# Altium PCB Buck.PcbDoc
Units mm, origin at the board's own origin, x right, y up, seen from the top; angles counter-clockwise.
Board outline 26.67 x 28.45 mm, 2 copper layers (Top Layer, Bottom Layer); 18 components, 8 nets, 40 pads, 10 vias.
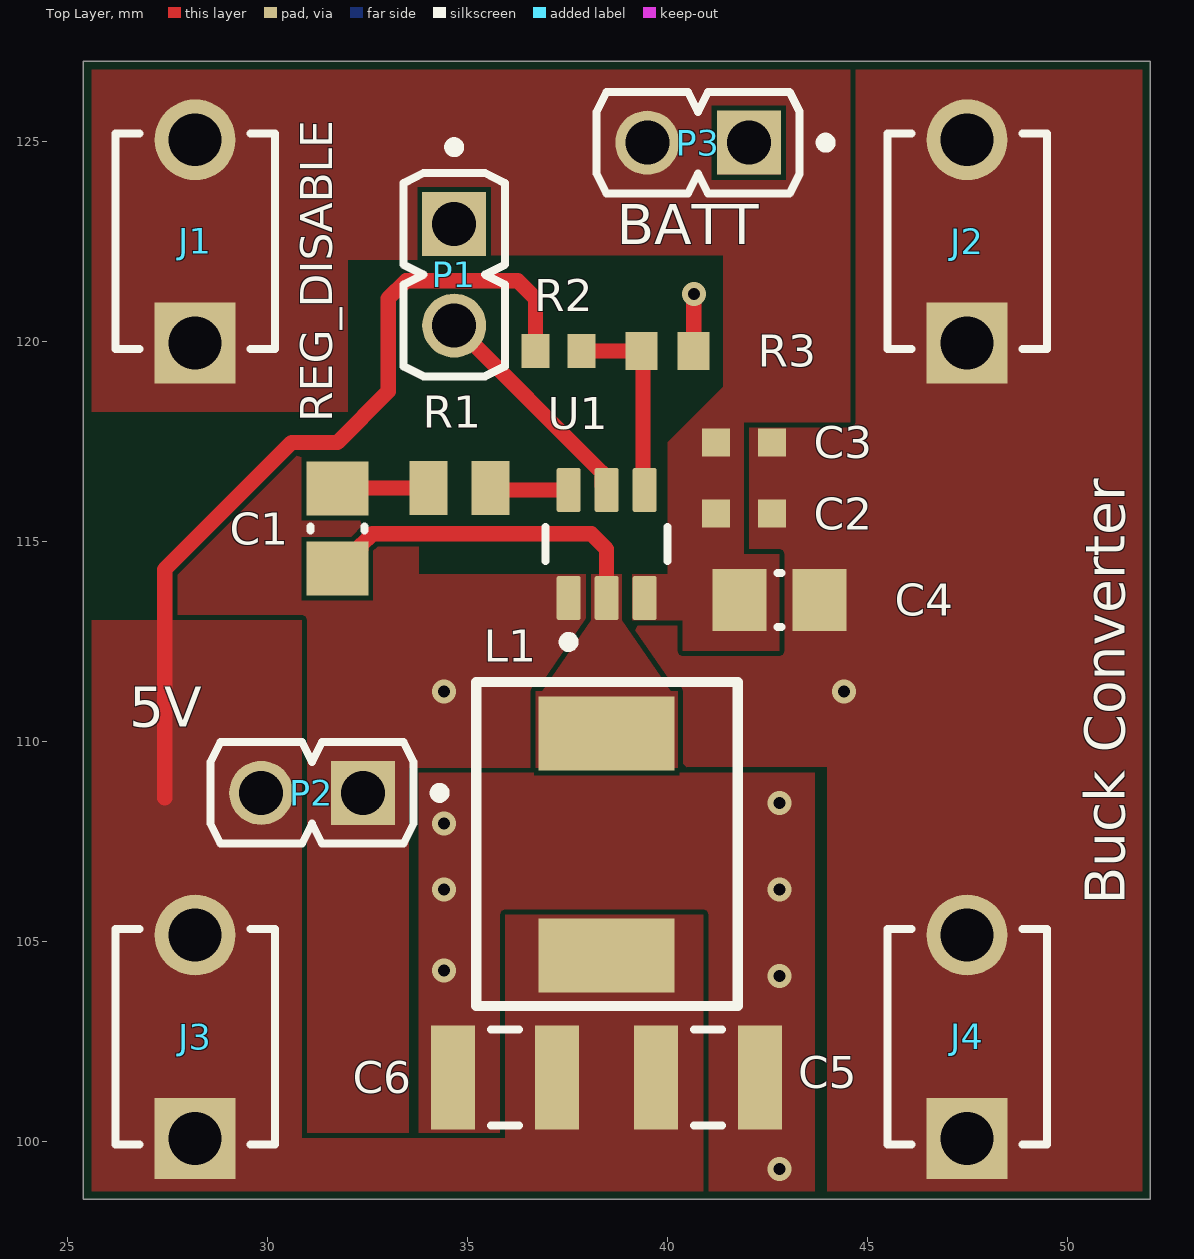
[diagram p0: Top Layer view]
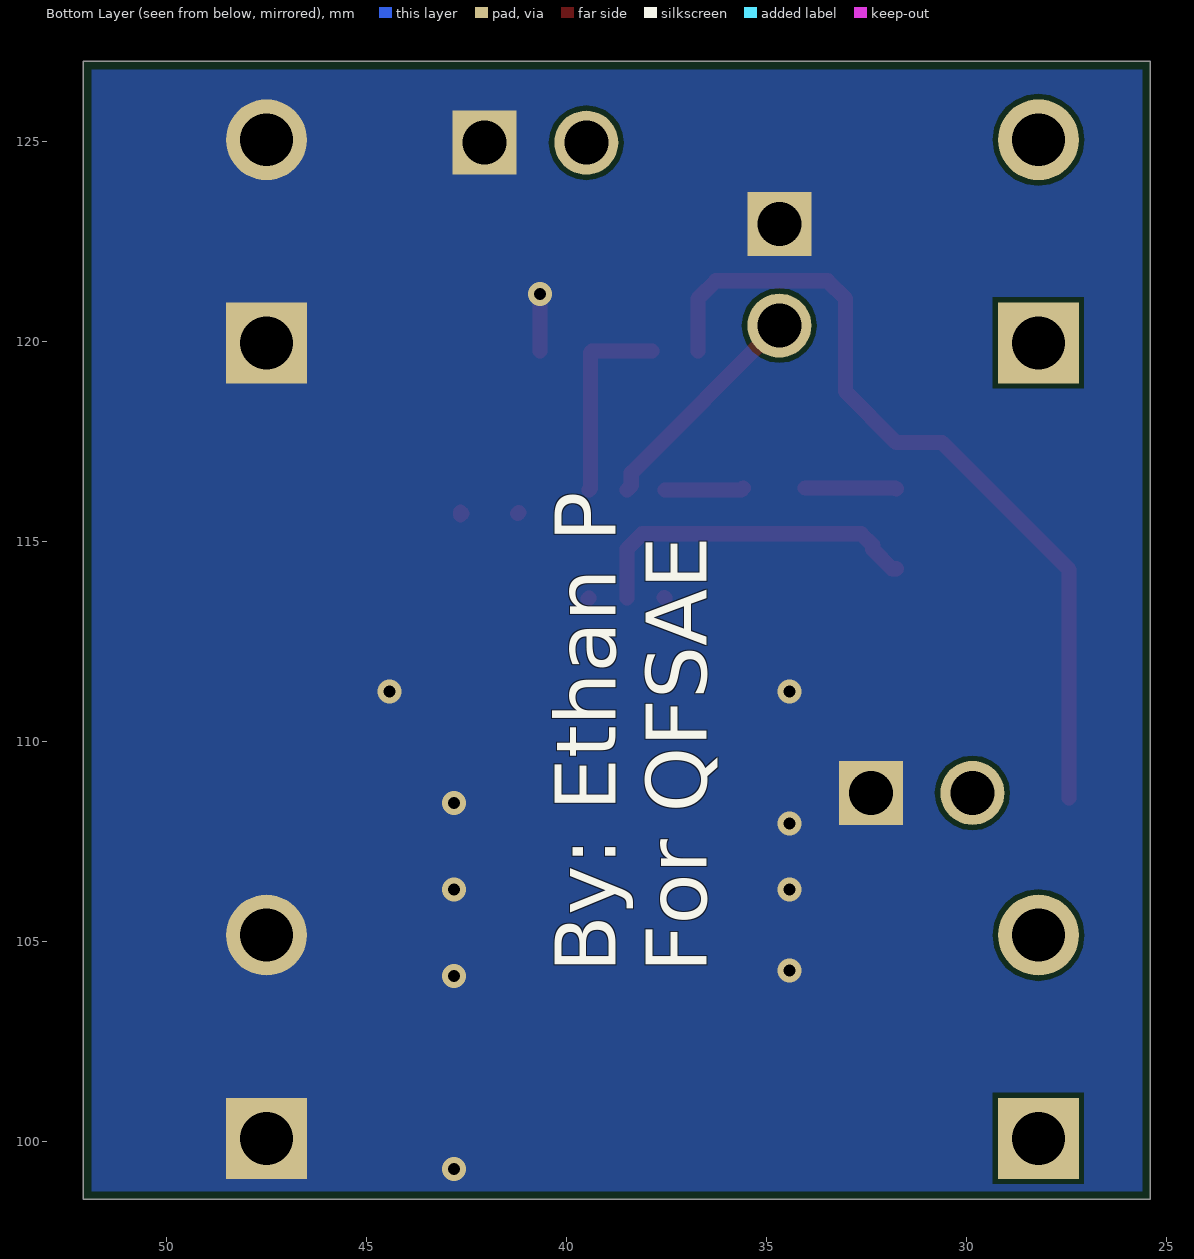
[diagram p1: Bottom Layer view, seen from below]
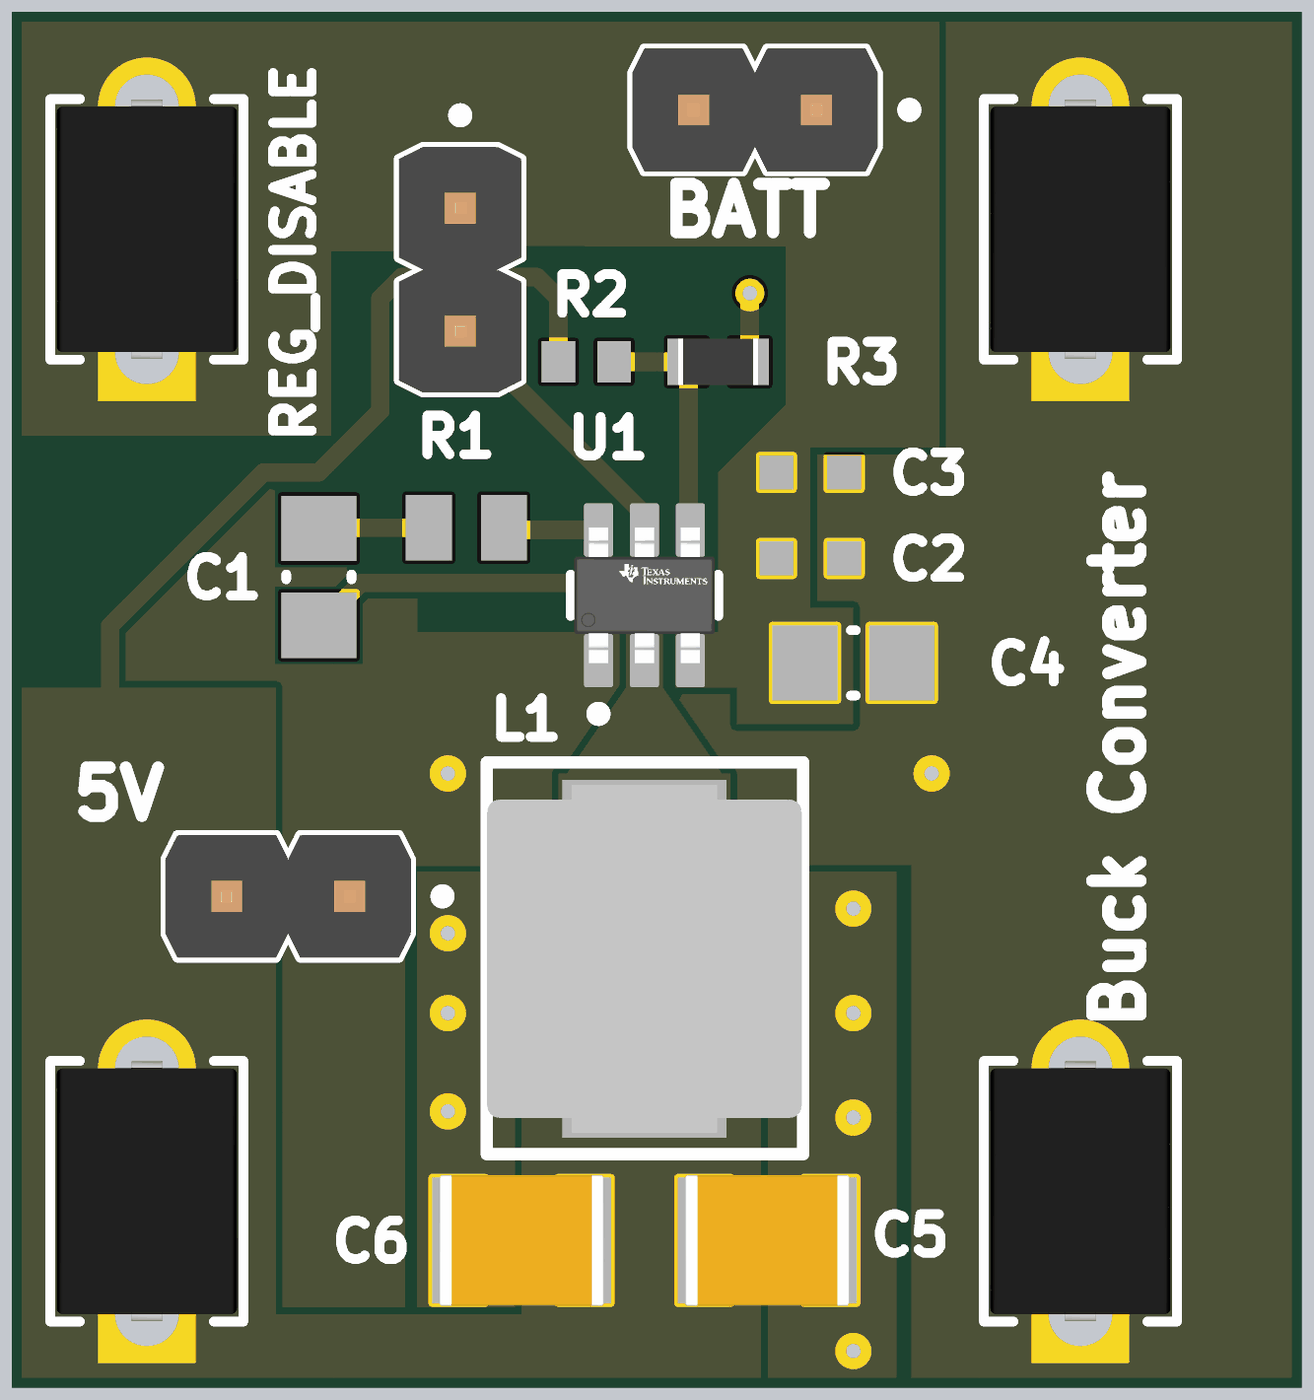
[diagram p2: 3D render of the assembled board from above, using the file's embedded part models]

## Layer stack, top to bottom
Top Solder: solder mask 0.0102, Solder Resist, Dk 3.5
Top Layer: signal copper 0.0356
Dielectric 1: dielectric 0.32, FR-4, Dk 4.8
Bottom Layer: signal copper 0.0356
Bottom Solder: solder mask 0.0102, Solder Resist, Dk 3.5

## Board outline
25.4,98.552 25.4,127 52.07,127 52.07,98.552

## Design rules (kind name [scope] priority, off if disabled: settings)
BoardOutlineClearance [All] p1: gap=0.2 ignorepadtopadclearanceinfootprint=FALSE
Clearance [All] p1: gap=0.127 ignorepadtopadclearanceinfootprint=FALSE except(0.25: Arc-Hole Track-Hole SMDPad-Hole THPad-Hole Via-Hole Fill-Hole Poly-Hole Region-Hole Text-Hole)
ComponentClearance [All] p1: gap=0.127 collisioncheckmode=3 verticalgap=0.127 showdistances=TRUE
DiffPairsRouting [All] p1: maxlimit=0.254 minlimit=0.127 mostfreqgap=0.127 toplayer_minwidth=0.127 toplayer_maxwidth=25.4 toplayer_prefwidth=0.127 bottomlayer_minwidth=0.127 bottomlayer_maxwidth=25.4 bottomlayer_prefwidth=0.127 maxuncoupledlength=12.7
Height [All] p1: minheight=0 maxheight=1816.048 prefheight=12.7
HoleSize [All] p1: absolutevalues=TRUE maxlimit=6.3 minlimit=0.3 maxpercent=80.000 minpercent=20.000
HoleToHoleClearance [All] p1: gap=0.25 allowstackedmicrovias=FALSE
MinimumAnnularRing [All] p1: minimumring=0.076
MinimumSolderMaskSliver [All] p1: minsoldermaskwidth=0
PlaneClearance [All] p1: clearance=0.127
PlaneConnect PlaneConnectPowerPads [InPadClass('PowerPads')] p1: planeconnectstyle=Direct reliefexpansion=0.508 reliefentries=4 reliefconductorwidth=0.254 reliefairgap=0.254
PlaneConnect [All] p2: pad.planeconnectstyle=Relief pad.reliefexpansion=0.3 pad.reliefentries=4 pad.reliefconductorwidth=0.127 pad.reliefairgap=0.127 via.planeconnectstyle=Direct via.reliefexpansion=0.3 via.reliefentries=4 via.reliefconductorwidth=0.127 via.reliefairgap=0.127
PolygonConnect PolygonConnectPowerPads [All vs InNet('GND') or InNet('SW') or InNet('VCC5V') or InNet('VCC_BATT')] p1: connectstyle=Direct reliefconductorwidth=0.254 reliefentries=4 polygonreliefangle="90 Angle" airgapwidth=0.254
PolygonConnect [All] p2: thpad.connectstyle=Relief thpad.reliefconductorwidth=0.127 thpad.reliefentries=4 thpad.polygonreliefangle="90 Angle" thpad.airgapwidth=0.127 smdpad.connectstyle=Relief smdpad.reliefconductorwidth=0.127 smdpad.reliefentries=4 smdpad.polygonreliefangle="90 Angle" smdpad.airgapwidth=0.127 via.connectstyle=Direct via.reliefconductorwidth=0.127 via.reliefentries=4 via.polygonreliefangle="90 Angle" via.airgapwidth=0.127
RoutingVias [All] p1: holewidth=0.3 width=0.6 viastyle="Through Hole" minholewidth=0.3 minwidth=0.6 maxholewidth=0.6 maxwidth=6.6
SilkToSilkClearance [All] p1: silktosilkclearance=0
SilkToSolderMaskClearance [IsPad] p1: minsilkscreentomaskgap=0.127 clearancetoexposedcopper=TRUE
SolderMaskExpansion [All] p1: expansion=0.075 istentingtop=FALSE
Width [All] p1: maxlimit=25.4 minlimit=0.127 preferedwidth=0.127 minimp=50.000000 maximp=50.000000 favimp=50.000000
20 further rules are at their usual default settings.

## Components (designator, comment, footprint, x,y, rotation, side; value= is the part's Value field where it differs from the comment)
C1 "CAP 100nF 50V 0805(2012)" CAPC0805(2012)100_M 31.75,115.316 r90 top value=100nF
C2 "10 uF" CAPC1608X100X20VL10T10 41.91,115.697 r180 top
C3 "10 uF" CAPC1608X100X20VL10T10 41.91,117.475 r180 top
C4 "CAP 100nF 50V" CAPC0805(2012)100_M 42.799,113.538 r180 top value=100nF
C5 "22 uF" CAPC3225X279X50LL20T25 41.021,101.6 r180 top
C6 "22 uF" CAPC3225X279X50LL20T25 35.941,101.6 r0 top
J1 "105-1103-001" FP-105-1103-001-MFG 28.194,122.5 r90 top
J2 "105-1103-001" FP-105-1103-001-MFG 47.494,122.5 r90 top
J3 "105-1103-001" FP-105-1103-001-MFG 28.194,102.616 r90 top
J4 "105-1103-001" FP-105-1103-001-MFG 47.494,102.616 r90 top
L1 "5.6 uH" 470 38.481,107.423 r270 top
P1 "613 002 111 21" WE-61300211121_V 34.671,121.666 r270 top
P2 "613 002 111 21" WE-61300211121_V 31.115,108.712 r180 top
P3 "613 002 111 21" WE-61300211121_V 40.767,124.968 r180 top
R1 "30 RR1220Q-300-D" RESC2013X50X40LL20T20 34.798,116.332 r180 top
R2 "52.3k" RESC1609X50X30LL10T20 37.278,119.761 r180 top
R3 "10k" RESC1609X50X30NL8T20 40.005,119.761 r180 top
U1 "TPS56339DDCR" FP-DDC0006A-MFG 38.481,114.935 r90 top

## Footprints (in the part's own frame and the unit in brackets; to place one, negate y for a bottom-side part, rotate by r counter-clockwise, add the part's x,y. Pads: shape width x height; smd on the part's side, far side on the other; paste and mask are expansions set on the pad)
470 [mm]
  rect 1.85x3.4 smd mask+0: 1(-2.775,0) 2(2.775,0)
  silkscreen extent -4.06,-3.26 4.04,3.28, body extent -3.59,-3.25 3.59,3.25, height 3.97
CAPC0805(2012)100_M [mm] "Chip Capacitor, Body 2.0x1.2mm, Height 1.0mm, IPC Low Density"
  rect 1.35x1.55 smd: 1(-1,0) 2(1,0)
  silkscreen extent -0.05,-0.67 0.05,0.67, body extent -1.1,-0.72 1.1,0.72, height 1
CAPC1608X100X20VL10T10 [mm] "Chip CAP, 2-Leads, Body 1.6x0.8mm"
  rect 0.7x0.7 smd: 1(-0.7,0) 2(0.7,0)
  body extent -0.8,-0.4 0.8,0.4, height 1
CAPC3225X279X50LL20T25 [mm] "Chip Capacitor, 2-Leads, Body 3.40x2.70mm, IPC High Density"
  rect 1.1x2.6 smd: 1(-1.3,0) 2(1.3,0)
  silkscreen extent -0.35,-1.2 0.35,1.2, body extent -1.7,-1.35 1.7,1.35, height 2.79
FP-105-1103-001-MFG [mil]
  rect 79.56x79.56 hole 52 paste-39370.1 mask+0: 1(-100,0)
  round 79.56 hole 52 paste-39370.1 mask+0: 1(100,0)
  silkscreen extent -106,-79 106,79, body extent -144,-82 144,82, height 10
FP-DDC0006A-MFG [mm]
  rrect17% 1.1x0.6 smd paste+0 mask+0: 1(-1.35,0.95) 2(-1.35,0) 3(-1.35,-0.95) 4(1.35,-0.95) 5(1.35,0) 6(1.35,0.95)
  silkscreen extent -2.57,-1.53 0.42,1.53, body extent -2,-1.63 2,1.63, height 0.25
RESC1609X50X30LL10T20 [mm] "Chip Resistor, 2-Leads, Body 1.55x0.85mm, IPC High Density"
  rect 0.7x0.85 smd: 1(-0.575,0) 2(0.575,0)
  body extent -0.82,-0.48 0.82,0.48, height 0.5
RESC1609X50X30NL8T20 [mm] "Chip Resistor, 2-Leads, Body 1.65x0.95mm, IPC Medium Density"
  rect 0.8x0.95 smd: 1(-0.65,0) 2(0.65,0)
  body extent -0.82,-0.48 0.82,0.48, height 0.5
RESC2013X50X40LL20T20 [mm] "Chip Resistor, 2-Leads, Body 2.00x1.25mm, IPC High Density"
  rect 0.95x1.35 smd: 1(-0.775,0) 2(0.775,0)
  body extent -1.1,-0.72 1.1,0.72, height 0.5
WE-61300211121_V [mm] "Header, 2-Leads, Body 5.08x2.54mm, Pitch 2.54mm"
  rect 1.6x1.6 hole 1.1: 1(-1.27,0)
  round 1.6 hole 1.1: 2(1.27,0)
  silkscreen extent -3.31,-1.27 2.54,1.27, body extent -2.54,-1.27 2.54,1.27, height 8.54

## Part data
C1 C4: library part CMP-1036-04423-1, "CAP 100nF 50V ±20% 0805 (2012 Metric) Thickness 1mm SMD", Case-EIA=0805, Case-Metric=2012, Rated Voltage="50 V", Tolerance=Â±20%, Max Thickness="1 mm", Technology=SMT
C2 C3: library part CMP-2000-05442-1, "Chip Capacitor, 10 uF, +/- 20%, 25 V, -55 to 85 degC, 0603 (1608 Metric), RoHS, Tape and Reel", Capacitance=10µF, Manufacturer=TDK, Operating Temperature=-55degC~85degC, Package / Case=0603(1608Metric), Package Description="2-Pin Surface Mount Device, Body 1.6 x 0.8 mm", Package Reference=1608, PCN Part Number=MLCCPartNumberChange30/Nov/2012, Ratings=-, Standard Package=1, Temperature Coefficient=X5R, Tolerance=±20%, Voltage - Rated=25V, Applications=GeneralPurpose, Category=Capacitors, Datasheet URL=http://download.siliconexpert.com/pdfs/2016/2/22/9/40/35/949/tdk_/manual/8010476609961980104703407078c1608x5r1e106m080ac.pdf.pdf, Datasheet Version=Feb-16, Design Resources=20WNon-IsolatedBuckLEDDriverUsingPLLNK460KG, Family=CeramicCapacitors, Features=-, Height - Seated (Max)=-, Kits=445-9014-KIT-ND-KITMLCC100PF-22UF060310-50V, Lead Spacing=-, Lead Style=-, Manufacturer URL=http://www.tdk.com/, Mounting Type=SurfaceMount,MLCC, Online Catalog=CSeries,GeneralPurpose, Other Names=445-9015-1, Packaging=CutTape(CT), Product Training Modules=SEAT,CCV,andTVCLDesignToolsGuidetoReplacinganElectrolyticCapacitorwithanMLCC, RoHS Information=RoHSCertificate-MLCC, Series=C, Size / Dimension="0.063\"Lx0.031\"W(1.60mmx0.80mm)", Thickness (Max)="0.039\"(1.00mm)"
C5 C6: library part CMP-2000-05479-1, "Chip Capacitor, 22 uF, +/- 20%, 25 V, -55 to 85 degC, 1210 (3225 Metric), RoHS, Tape and Reel", Capacitance=22µF, Case Size/Dimension=1206, Dielectric=X5R, Manufacturer=AVX, Package Description="2-Pin Surface Mount Device, Body 3.2 x 2.5 mm", Package Reference=1210, Rated Voltage=25V, Tolerance (%)=±20%, Datasheet URL=http://datasheets.avx.com/cx5r.pdf, Datasheet Version=05/2016, Manufacturer URL=http://www.avx.com/, Mounting Technology=SurfaceMount
J1 J2 J3 J4: library part CMP-16032-000001-1, "CONN TIP JACK SOLDER BLACK", Current Rating=5A, Manufacturer="Bel Fuse", Temperature="-55°C to +75°C", Temperature Range High=+75°C, Temperature Range Low=-55°C, Voltage Rating=1500V, Automotive=No, Category=Conn, ComponentLink2Description=Datasheet, ComponentLink2URL=https://www.belfuse.com/resources/drawings/cinchconnectivitysolutions/johnson/dr-ccs-john-105-1103-001.pdf, Conn Gender=Female, Conn Orientation="Right Angle", Contact Material=Silver, Device Class L1=Connectors, Device Class L2="Headers and Wire Housings", Device Class L3=unset, Digikey Description="CONN TIP JACK SOLDER BLACK", Height=0.213inch, Is Female=yes, Lead Free=Yes, Manufacturer Part Number=105-1103-001, Number Of Contacts=1, Number Of Rows=1, Octopart=https://octopart.com/105-1103-001-bel+fuse-73381038, Package=105-1103-001, RoHS=TRUE
L1: library part SRP6540-5R6M
P1 P2 P3: library part CMP-1712-00002-3, "Male Header, Pitch 2.54 mm, 1 x 2 Position, Height 8.54 mm, Tail Length 3 mm, -40 to 105 degC, RoHS, Bulk", Max Operating Temperature="125 degC", Min Operating Temperature="-40 degC", ComponentLink1Description="Manufacturer URL", ComponentLink1URL=https://www.we-online.com/, ComponentLink2Description=Datasheet, ComponentLink2URL=http://katalog.we-online.de/em/datasheet/6130xx11121.pdf, DatasheetVersion="Rev. J", Mount="Through Hole", Mounting Technology="Through Hole", PackageDescription="Male Header, Pitch 2.54 mm, 1 x 2 Position, Height 8.54 mm, Tail Length 3 mm", Packaging=Bulk, PartNumber="613 002 111 21", Pins=2, REACH SVHC="No SVHC", RoHSCompliant=True
R1: library part CMP-2001-03553-1, Manufacturer=Susumu, Part Number=RR1220Q-300-D
R2: library part CMP-2000-03451-1, Manufacturer="Vishay Dale", Part Number=CRCW060352K3FKEA
R3: library part CMP-1666-00005-4, "Chip Resistor, 10 KOhm, +/- 1%, 100 mW, -55 to 155 degC, 0603 (1608 Metric), RoHS, Tape and Reel", Manufacturer="Vishay Semiconductor", Max Operating Temperature="155 degC", Min Operating Temperature="-55 degC", Package Quantity=5000, Voltage Rating="75 V", ComponentLink1Description="Manufacturer URL", ComponentLink1URL=http://www.vishay.com/, ComponentLink2Description=Datasheet, ComponentLink2URL=https://datasheet.ciiva.com/11809/0900766b80d98afc-11809037.pdf, DatasheetVersion=06/2012, Height="0.45 mm", Length="1.55 mm", Mounting Technology="Surface Mount", PackageDescription="2-Pin Surface Mount Device, Body 1.575 x 0.85 mm", PackageReference=0603, Packaging="Tape and Reel", REACH SVHC=Unknown, RoHSCompliant=true
U1: library part CMP-04918-000012-1, "PWR MGMT SPECIALIZED REGULATOR", Manufacturer="Texas Instruments", Max Junction Temp=+125°C, Max Supply Voltage=24V, Min Supply Voltage=4.5V, Nominal Supply Current=98uA, Output Current=3A, Output Voltage=0.8-16V, Package=DDC0006A, Switching Frequency=500kHz, Temperature="-40°C to +125°C", Temperature Range Low=-40°C, Automotive=No, Category=IC, ComponentLink2Description=Datasheet, ComponentLink2URL=http://www.ti.com/lit/ds/symlink/tps56339.pdf, Device Class L1="Integrated Circuits (ICs)", Device Class L2="Power Management ICs", Device Class L3="Voltage Regulators - Switching", Digikey Description="PWR MGMT SPECIALIZED REGULATOR", Height=1.1mm, Lead Free=Yes, Manufacturer Part Number=TPS56339DDCR, Max Duty Cycle=97%, Mouser Description="4.5-V to 24-V input, 3-A output synchronous buck converter 6-SOT-23-THIN -40 to 125", Number Of Outputs=1, Octopart=https://octopart.com/tps56339ddcr-texas+instruments-101466410, Output Type=AdjustableProgrammable, RoHS=TRUE, Standoff Height=0mm, Switching Topology=Buck, Temperature Range High=+125°C

## Via types
v1: diameter 0.6, hole 0.3, Top Layer to Bottom Layer, 10 vias

## Nets (pads, with @x,y where several pads share a name; then routed paths per layer and width w, separated by ;. In a path a pad name is that pad's centre, name@x,y a point inside that pad or via, vN(x,y) a via of type N, cw(c..) or ccw(c..) an arc to the next point about the centre after c; other vN are vias at no path point)
FB: R2.1 R3.2 U1.4 | length 5
  Top Layer w0.381: R2.1 R3.2 39.393,119.723 39.393,116.323 U1.4
GND: C2.1 C3.1 C4.1 C5.1 C6.1 J2.1 J4.1 P1.1 P2.1 P3.1 R3.1 U1.1 | length 1.5
  Top Layer w0.381: U1.1 U1.1@37.546,113.6 ; R3.1 40.658,119.763 40.658,121.177 v1(40.66,121.18) ; C2.1@42.641,115.666 C2.1 C2.1@42.641,115.728
  other v1: 42.799,99.314 42.799,104.14 34.417,104.267 34.417,106.299 42.799,106.299 34.417,107.95 42.799,108.458 34.417,111.252 44.417,111.252
NetC1_2: C1.2 R1.2 | length 2.3
  Top Layer w0.381: C1.2 31.766,116.332 R1.2
NetP1_2: P1.2 U1.5 | length 5.7
  Top Layer w0.381: P1.2 34.689,120.396 38.372,116.714 38.372,116.394 U1.5
NetR1_1: R1.1 U1.6 | length 2
  Top Layer w0.381: R1.1 35.62,116.285 U1.6
SW: C1.1 L1.1 U1.2 | length 8.5
  Top Layer w0.381: C1.1 31.85,114.316 32.334,114.8 32.334,114.9 32.623,115.189 38.1,115.189 38.481,114.808 U1.2
VCC5V: C5.2 C6.2 J3.1 L1.2 P2.2 R2.2 | length 20.8
  Top Layer w0.381: 27.432,108.585 27.432,114.3 30.607,117.475 31.75,117.475 33.02,118.745 33.02,121.071 33.463,121.514 36.26,121.514 36.703,121.071 R2.2
VCC_BATT: C2.2 C3.2 C4.2 J1.1 P3.2 U1.3 | length 0.1
  Top Layer w0.381: U1.3 U1.3@39.455,113.561 ; C2.2@41.186,115.72 C2.2

## Polygon pours and split planes (outlines as drawn)
GND on Bottom Layer "GND_L02_P000" (solid, remove dead copper, pour order 0): 22.225,129.794 22.225,93.218 62.611,93.218 62.611,129.921
GND on Top Layer "GND_L01_P016" (solid, remove dead copper, pour order 16): 44,97.907 44,109.361 33.53,109.334 33.53,97.907 23.495,97.907 23.495,128.133 57.658,128.133 57.658,97.907
VCC_BATT on Top Layer "Top Layer-VCC_BATT" (solid, pour order 14): 40.386,113.03 40.386,112.268 42.799,112.268 42.799,114.681 41.91,114.681 41.91,117.983 44.577,117.983 44.577,127.635 41.402,127.635 41.402,127.381 25.019,127.381 25.019,118.237 32.004,118.237 32.004,122.047 41.402,122.047 41.402,118.872 39.91,118.872 39.91,114.173 39.116,114.173 39.116,113.03
SW on Top Layer "Top Layer-SW" (solid, pour order 4): 36.703,109.347 40.259,109.347 40.259,111.252 40.084,111.252 38.862,113.03 38.862,114.173 38.1,114.173 38.1,113.03 36.878,111.252 36.703,111.252
GND on Top Layer "GND_L01_P015" (solid, pour order 15): 33.782,109.22 43.688,109.22 43.688,98.171 33.782,98.171
no net on Top Layer "NONET_L01_P012" (solid, pour order 12): 39.37,114.173
VCC5V on Top Layer "Top Layer-VCC5V" (solid, pour order 7): 35.941,97.028 40.894,97.028 40.894,105.664 35.941,105.664 35.941,100.076 30.861,100.076 30.861,113.03 24.638,113.03 24.638,98.298 35.941,98.298

## Other copper
Top Layer:
  pour cut-out: 33.79,122.157 33.79,114.173 40.006,114.173 40.006,117.476 41.402,118.872 41.402,122.142

## Silkscreen, mask and mechanical layers (free items; w line width, h text height)
Top Overlay:
  text "BATT" at 38.735,122.428 h1
  text "REG_DISABLE" at 31.617,117.983 h0.8 r90
  text "5V" at 26.543,110.363 h1
  text "Buck Converter" at 51.435,105.918 h1 r90
Bottom Overlay:
  text "By: Ethan P / For QFSAE" at 36.48,104.22 h1.52 r270
Mechanical 1:
  the board outline again, w0.1